# Altium PCB ESC.PcbDoc
Units mil, origin at the board's own origin, x right, y up, seen from the top; angles counter-clockwise.
Board outline 1760 x 2730 mil, 2 copper layers (Top Layer, Bottom Layer); 71 components, 57 nets, 293 pads, 166 vias.
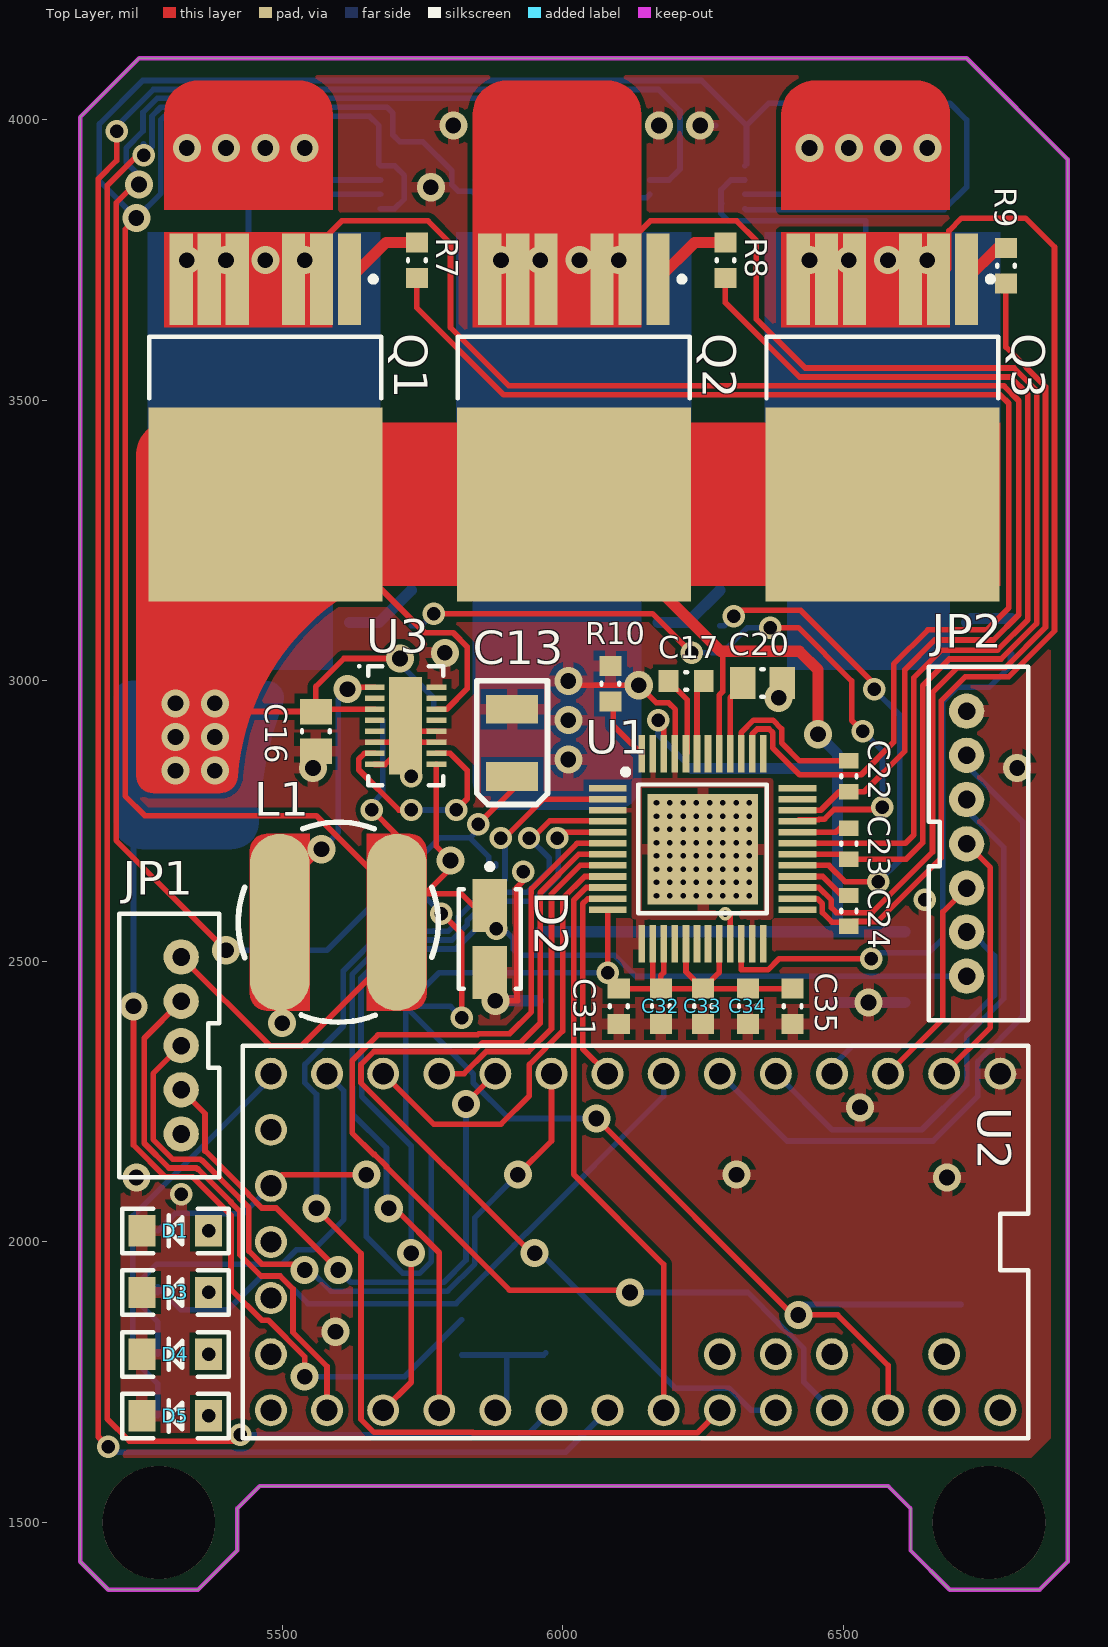
[diagram p0: Top Layer view]
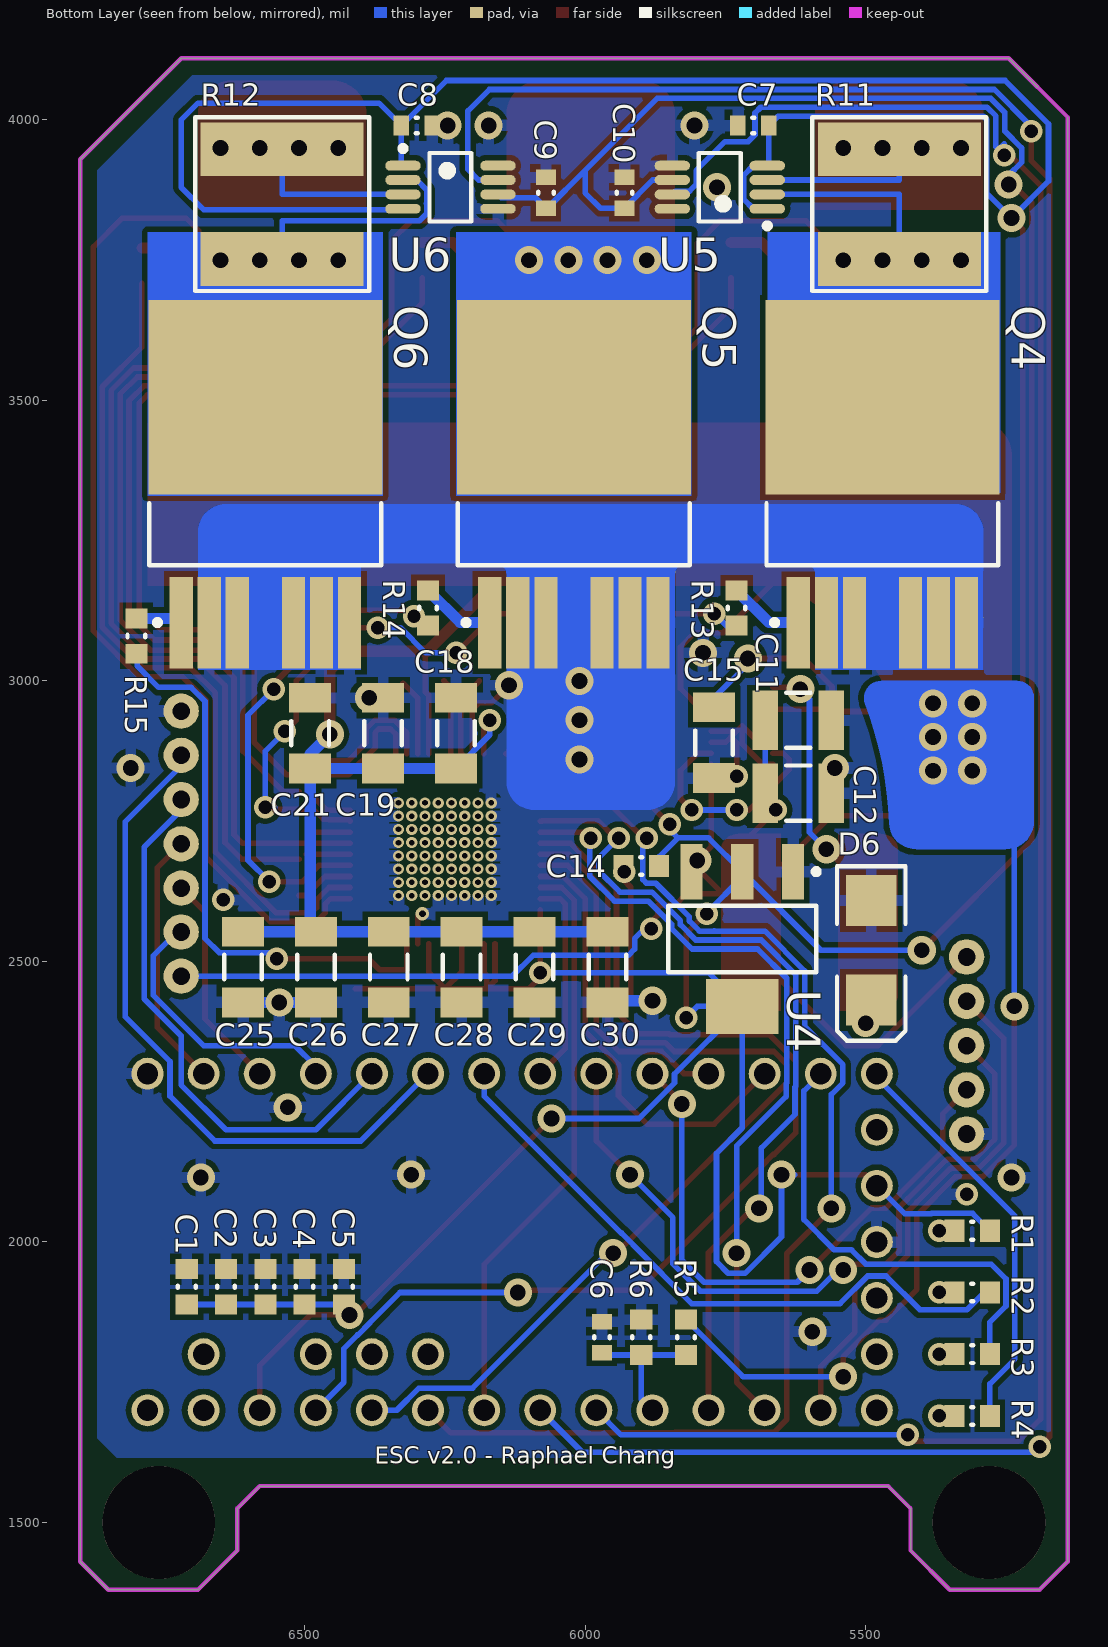
[diagram p1: Bottom Layer view, seen from below]

## Layer stack, top to bottom
Top Solder: solder mask 0.4, Solder Resist, Dk 3.5
Top Layer: signal copper 1.4
Dielectric 1: dielectric 12.6, FR-4, Dk 4.8
Bottom Layer: signal copper 1.4
Bottom Solder: solder mask 0.4, Solder Resist, Dk 3.5

## Board outline
5140,1430 5190,1380 5350,1380 5420,1450 5420,1525 5460,1565 6580,1565 6620,1525 6620,1450 6690,1380 6850,1380 6900,1430 6900,3930 6720,4110 5245,4110 5140,4005

## Design rules (kind name [scope] priority, off if disabled: settings)
Clearance Clearance_1 [InPolygon] p1: gap=9.84
Clearance [All] p2: gap=5.91
PolygonConnect [All] p1: connectstyle=Relief reliefconductorwidth=20 reliefentries=4 polygonreliefangle="90 Angle" airgapwidth=10
RoutingVias [All] p1: holewidth=28 width=50 viastyle="Through Hole" minholewidth=24 minwidth=40 maxholewidth=28 maxwidth=50
SolderMaskExpansion [All] p1: expansion=4
Width [All] p1: maxlimit=50 minlimit=10 preferedwidth=10
30 further rules are at their usual default settings.

## Classes and differential pairs
component class ESC: JP1 JP2
component class U_MCU: C1 C2 C3 C4 C5 C6 C7 C8 C9 C10 D1 D3 D4 D5 R1 R2 R3 R4 R5 R6 U2 U5 U6
component class U_Power: C11 C12 C13 C14 C15 C16 C17 C18 C19 C20 C21 C22 C23 C24 C25 C26 C27 C28 C29 C30 C31 C32 C33 C34 C35 D2 D6 L1 Q1 Q2 Q3 Q4 Q5 Q6 R7 R8 R9 R10 R11 R12 R13 R14 R15 U1 U3 U4

## Components (designator, comment, footprint, x,y, rotation, side; value= is the part's Value field where it differs from the comment)
C1 "2.2uF" CAPC0603(1608)55_N 6710,1920 r270 bottom
C2 "2.2uF" CAPC0603(1608)55_N 6640,1920 r270 bottom
C3 "2.2uF" CAPC0603(1608)55_N 6570,1920 r270 bottom
C4 "2.2uF" CAPC0603(1608)55_N 6500,1920 r270 bottom
C5 "2.2uF" CAPC0603(1608)55_N 6430,1920 r270 bottom
C6 "0.1uF" CAPC0603(1608)100_L 5970,1830 r90 bottom
C7 "10uF" CAPC0603(1608)100_L 5700,3990 r0 bottom
C8 "10uF" CAPC0603(1608)100_L 6300,3990 r180 bottom
C9 "0.1uF" CAPC0603(1608)100_L 6070,3870 r270 bottom
C10 "0.1uF" CAPC0603(1608)100_L 5930,3870 r270 bottom
C11 "100uF" CAPC1210(3225)280_N 5620,2930 r0 bottom
C12 "100uF" CAPC1210(3225)280_N 5620,2800 r0 bottom
C13 "100uF" AVX-CAPC7343_V 5910,2890 r90 top
C14 "2.2uF" CAPC0603(1608)55_N 5900,2670 r0 bottom
C15 "10uF" CAPC1206(3216)190_M 5770,2890 r90 bottom
C16 "4.7uF" CAPC0805(2012)145_N 5560,2910 r90 top
C17 "470nF" CAPC0603(1608)100_N 6220,3000 r0 top
C18 "10uF" CAPC1206(3216)190_M 6230,2907.01 r270 bottom
C19 "10uF" CAPC1206(3216)190_M 6360,2907.01 r270 bottom
C20 "10uF" CAPC0805(2012)145_N 6356.06,2996.16 r0 top
C21 "10uF" CAPC1206(3216)190_M 6490,2907.01 r270 bottom
C22 "470nF" CAPC0603(1608)100_L 6510,2830 r270 top
C23 "470nF" CAPC0603(1608)100_L 6510,2710 r270 top
C24 "470nF" CAPC0603(1608)100_L 6510,2590 r270 top
C25 "10uF" CAPC1206(3216)190_M 6610,2490 r90 bottom
C26 "10uF" CAPC1206(3216)190_M 6480,2490 r90 bottom
C27 "10uF" CAPC1206(3216)190_M 6350,2490 r90 bottom
C28 "10uF" CAPC1206(3216)190_M 6220,2490 r90 bottom
C29 "10uF" CAPC1206(3216)190_M 6090,2490 r90 bottom
C30 "10uF" CAPC1206(3216)190_M 5960,2490 r90 bottom
C31 "2.2uF" CAPC0603(1608)55_N 6100,2420 r90 top
C32 "2.2uF" CAPC0603(1608)55_N 6175,2420 r90 top
C33 "2.2uF" CAPC0603(1608)55_N 6250,2420 r90 top
C34 "2.2uF" CAPC0603(1608)55_N 6330,2420 r90 top
C35 "2.2uF" CAPC0603(1608)55_N 6410,2420 r90 top
D1 "LED-BLUE" LED-1206 5310,2020 r180 top
D2 "TVS 5V" VISH-DO-214AC-2_N 5870,2540 r270 top
D3 "LED-GREEN" LED-1206 5310,1910 r180 top
D4 "LED-RED" LED-1206 5310,1800 r180 top
D5 "LED-AMBER" LED-1206 5310,1690 r180 top
D6 "" SMB 5490,2520 r270 bottom
JP1 "Control Pins" JST-5-PTH-VERT 5320,2350 r90 top
JP2 "Encoder Pins" JST-7-PTH-VERT 6720,2710 r270 top
L1 "SDR0805-180ML" SDR0805-180ML 5600,2570 r0 top
Q1 "IRFS7530" DPAK127P1525X483-7N 5470,3470 r270 top
Q2 "IRFS7530" DPAK127P1525X483-7N 6020,3470 r270 top
Q3 "IRFS7530" DPAK127P1525X483-7N 6570,3470 r270 top
Q4 "IRFS7530" DPAK127P1525X483-7N 5470,3350 r90 bottom
Q5 "IRFS7530" DPAK127P1525X483-7N 6020,3350 r90 bottom
Q6 "IRFS7530" DPAK127P1525X483-7N 6570,3350 r90 bottom
R1 "10R" RESC0603(1608)_N 5310,2020 r180 bottom
R2 "15R" RESC0603(1608)_N 5310,1910 r180 bottom
R3 "180R" RESC0603(1608)_N 5310,1800 r180 bottom
R4 "150R" RESC0603(1608)_N 5310,1690 r180 bottom
R5 "200K" RESC0603(1608)_N 5820,1830 r90 bottom
R6 "10K" RESC0603(1608)_N 5900,1830 r90 bottom
R7 "4R7" RESC0603(1608)_N 5740,3750 r270 top
R8 "4R7" RESC0603(1608)_N 6290,3750 r270 top
R9 "4R7" RESC0603(1608)_N 6790,3740 r270 top
R10 "3K3" RESC0603(1608)_N 6085,2995 r270 top
R11 "" Shunt 5440,3850 r270 bottom
R12 "" Shunt 6540,3850 r270 bottom
R13 "4R7" RESC0603(1608)_N 5730,3130 r270 bottom
R14 "4R7" RESC0603(1608)_N 6280,3130 r270 bottom
R15 "4R7" RESC0603(1608)_N 6800,3080 r270 bottom
U1 "A4935" LQFP-48 6250,2700 r0 top
U2 "Teensy 3.0" TEENSY_3.0+4 6130,2000 r270 top
U3 "LTC3637" SON50P300X85_HS-17N 5720,2920 r0 top
U4 "TC2117" SOT-223-DB3_M 5720,2540 r270 bottom
U5 "LT1999" LT-MS8-8_N 5760,3880 r0 bottom
U6 "LT1999" LT-MS8-8_N 6240,3880 r180 bottom

## Footprints (in the part's own frame and the unit in brackets; to place one, negate y for a bottom-side part, rotate by r counter-clockwise, add the part's x,y. Pads: shape width x height; smd on the part's side, far side on the other; paste and mask are expansions set on the pad)
AVX-CAPC7343_V [mm] "SMT Capacitor, 2 Leads, Body 7.3x4.3mm"
  rect 1.3x2.35 smd: 1(-1.535,0.001) 2(1.515,0.001)
  silkscreen extent -2.8,-1.6 2.8,1.6, body extent -2.1,-1.1 2.1,1.1, height 1.9
CAPC0603(1608)55_N [mm] "Chip Capacitor, Body 1.6x0.8mm, Height 0.55mm, IPC Medium Density"
  rect 0.9x1 smd: 1(-0.8,0) 2(0.8,0)
  silkscreen extent -0.05,-0.4 0.05,0.4, body extent -0.87,-0.48 0.88,0.47, height 0.55
CAPC0603(1608)100_L [mm] "Chip Capacitor, Body 1.6x0.8mm, Height 1.0mm, IPC High Density"
  rect 0.7x0.9 smd: 1(-0.7,0) 2(0.7,0)
  silkscreen extent -0.05,-0.35 0.05,0.35, body extent -0.87,-0.47 0.88,0.48, height 1
CAPC0603(1608)100_N [mm] "Chip Capacitor, Body 1.6x0.8mm, Height 1.0mm, IPC Medium Density"
  rect 0.9x1 smd: 1(-0.8,0) 2(0.8,0)
  silkscreen extent -0.05,-0.4 0.05,0.4, body extent -0.87,-0.48 0.88,0.47, height 1
CAPC0805(2012)145_N [mm] "Chip Capacitor, Body 2.0x1.2mm, Height 1.45mm, IPC Medium Density"
  rect 1.15x1.45 smd: 1(-0.9,0) 2(0.9,0)
  silkscreen extent -0.05,-0.62 0.05,0.63, body extent -1.1,-0.72 1.1,0.73, height 1.45
CAPC1206(3216)190_M [mm] "Chip Capacitor, Body 3.2x1.6mm, Height 1.9mm, IPC Low Density"
  rect 1.35x1.9 smd: 1(-1.6,0) 2(1.6,0)
  silkscreen extent -0.55,-0.85 0.55,0.85, body extent -1.7,-0.9 1.7,0.9, height 1.9
CAPC1210(3225)280_N [mm] "Chip Capacitor, Body 3.2x2.5mm, Height 2.8mm, IPC Medium Density"
  rect 1.15x2.7 smd: 1(-1.5,0) 2(1.5,0)
  silkscreen extent -0.55,-1.25 0.55,1.25, body extent -1.7,-1.4 1.7,1.4, height 2.8
DPAK127P1525X483-7N [mm] "D2-PAK, 7-Pads, Body 7.93x8.63mm (max), IPC Medium Density"
  rect 4.15x1.05 smd mask+0.051: 1(-6.25,3.81) 2(-6.25,2.54) 2(-6.25,-1.27) 2(-6.25,1.27) 2(-6.25,-3.81) 2(-6.25,-2.54)
  rect 8.8x10.6 smd: 8(3.95,0)
  silkscreen extent -6.37,-5.25 -0.85,5.25, body extent -7,-5 8,5, height 4.2
JST-5-PTH-VERT [mil]
  round 63 hole 31.5: 1(-157.48,0) 2(-78.74,0) 3(0,0) 4(79,0) 5(158,0)
  silkscreen extent -234,-68 235,110, body extent -236,-69 232,108, height 236
JST-7-PTH-VERT [mil]
  round 63 hole 31.5: 1(-236.22,0) 2(-157.48,0) 3(-78.74,0) 4(0.26,0) 5(79.26,0) 6(157.48,0) 7(236.22,0)
  silkscreen extent -315,-68 315,110, body extent -317,-67 309,110, height 236
LED-1206 [mil]
  rect 48x56 smd: A(-59.06,0) C(60,0)
  silkscreen extent -94,-39 95,40, body extent -63,-31 63,31, height 43
LQFP-48 [mm]
  rect 1.7x0.3 smd mask+0.076: 1(-4.318,2.767) 2(-4.318,2.267) 3(-4.318,1.767) 4(-4.318,1.267) 5(-4.318,0.767) 6(-4.318,0.267) 7(-4.318,-0.233) 8(-4.318,-0.733) 9(-4.318,-1.233) 10(-4.318,-1.733) 11(-4.318,-2.233) 12(-4.318,-2.733) 25(4.282,-2.733) 26(4.282,-2.233) 27(4.282,-1.733) 28(4.282,-1.233) 29(4.282,-0.733) 30(4.282,-0.233) 31(4.282,0.267) 32(4.282,0.767) 33(4.282,1.267) 34(4.282,1.767) 35(4.282,2.267) 36(4.282,2.767)
  rect 0.3x1.7 smd mask+0.076: 13(-2.768,-4.283) 14(-2.268,-4.283) 15(-1.768,-4.283) 16(-1.268,-4.283) 17(-0.768,-4.283) 18(-0.268,-4.283) 19(0.232,-4.283) 20(0.732,-4.283) 21(1.232,-4.283) 22(1.732,-4.283) 23(2.232,-4.283) 24(2.732,-4.283) 37(2.732,4.317) 38(2.232,4.317) 39(1.732,4.317) 40(1.232,4.317) 41(0.732,4.317) 42(0.232,4.317) 43(-0.268,4.317) 44(-0.768,4.317) 45(-1.268,4.317) 46(-1.768,4.317) 47(-2.268,4.317) 48(-2.768,4.317)
  rect 5x5 smd: 49(0,0)
  silkscreen extent -3.63,-2.9 2.9,3.63, body extent -4.5,-4.5 4.5,4.5, height 1.5
LT-MS8-8_N [mm] "SOP, 8-Leads, Body 3x3mm, Pitch 0.65mm, IPC Medium Density"
  oval 1.6x0.45 smd: 1(-2.15,0.975) 2(-2.15,0.325) 3(-2.15,-0.325) 4(-2.15,-0.975) 5(2.15,-0.975) 6(2.15,-0.325) 7(2.15,0.325) 8(2.15,0.975)
  silkscreen extent -2.27,-1.55 0.95,1.87, body extent -1.55,-1.55 1.55,1.55, height 1.1
RESC0603(1608)_N [mm] "Chip Resistor, Body 1.6x0.8mm, IPC Medium Density"
  rect 0.9x1 smd: 1(-0.8,0) 2(0.8,0)
  silkscreen extent -0.05,-0.4 0.05,0.4, body extent -0.85,-0.47 0.85,0.47, height 0.6
SDR0805-180ML [mm]
  rrect100% 2.7x8 smd: 1(-2.65,0) 2(2.65,0)
  Top Layer region: -3.25,4 -1.3,4 -1.3,-4 -3.25,-4 -3.537,-3.943 -3.78,-3.78 -3.943,-3.537 -4,-3.25 -4,-3.25 -4,3.25 -3.943,3.537 -3.78,3.78 -3.537,3.943 -3.25,4
  Top Layer region: 3.25,4 1.3,4 1.3,-4 3.25,-4 3.537,-3.943 3.78,-3.78 3.943,-3.537 4,-3.25 4,-3.25 4,3.25 3.943,3.537 3.78,3.78 3.537,3.943 3.25,4
  silkscreen extent -4.52,-4.53 4.52,4.52, body extent -3.9,-3.9 3.9,3.9, height 5.3
Shunt [mm]
  rect 2.44x7.38 smd: 1(-2.48,0) 2(2.48,0)
  silkscreen extent -3.94,-3.94 3.94,3.94
SMB [mm] "DO-214-AA/SMB; 2 C-Bend Leads; Body 5.3 x 3.6 mm, inc. leads (LxW)"
  rect 2.3x2.3 smd: 1(-2.25,0) 2(2.25,0)
  silkscreen extent -3.8,-1.55 4.1,1.55
SON50P300X85_HS-17N [mm] "SON, 16-Leads, Body 5.00x3.00mm, Pitch 0.50mm, Thermal Pad 4.40x1.49mm, IPC Medium Density"
  rect 0.9x0.25 smd mask+0.076: 1(-1.395,1.75) 2(-1.395,1.25) 3(-1.395,0.75) 4(-1.395,0.25) 5(-1.395,-0.25) 6(-1.395,-0.75) 7(-1.395,-1.25) 8(-1.395,-1.75) 9(1.395,-1.75) 10(1.395,-1.25) 11(1.395,-0.75) 12(1.395,-0.25) 13(1.395,0.25) 14(1.395,0.75) 15(1.395,1.25) 16(1.395,1.75)
  rect 1.49x4.4 smd mask+0.076: 17(0,0)
  silkscreen extent -2.15,-2.7 1.7,2.75, body extent -1.56,-2.05 1.56,2.05, height 0.8
SOT-223-DB3_M [mm] "SOT223, 4-Leads, Body 6.5x3.5mm, Pitch 2.3mm, Lead Span 7mm, IPC Low Density"
  rect 2.5x1 smd: 1(-3.05,2.3) 2(-3.05,0) 3(-3.05,-2.3)
  rect 2.5x3.3 smd: 2(3.05,0)
  silkscreen extent -3.17,-3.35 1.5,3.47, body extent -1.85,-3.35 1.85,3.35, height 1.8
TEENSY_3.0+4 [mil]
  round 57 hole 38: 0(-300,550) 1(-300,450) 2(-300,350) 3(-300,250) 3.3V(300,450) 3.3V1(-100,-650) 4(-300,150) 5(-300,50) 6(-300,-50) 7(-300,-150) 8(-300,-250) 9(-300,-350) 10(-300,-450) 11(-300,-550) 12(-300,-650) 13(300,-650) 14/A0(300,-550) 15/A1(300,-450) 16/A2(300,-350) 17/A3(300,-250) 18/A4(300,-150) 19/A5(300,-50) 20/A6(300,50) 21/A7(300,150) 22/A8(300,250) 23/A9(300,350) A10(200,250) A11(200,150) AGND(300,550) AREF(200,350) GND(-300,650) GND1(0,-650) PGM(100,-650) RESET(200,-650) VBAT(-200,-650) VIN(300,650) VUSB(200,550)
  silkscreen extent -350,-700 350,700, body extent -348,-708 349,720, height 505
VISH-DO-214AC-2_N [mm] "DO-214AC, 2-Leads, Body 4.5x2.79mm, IPC Medium Density"
  rect 2.4x1.55 smd: 1(-1.525,0) 2(1.525,0)
  silkscreen extent -3.4,-1.4 2.25,1.4, body extent -2.25,-1.4 2.25,1.39, height 2.29

## Part data
C1 C2 C3 C4 C5 C14 C31 C32 C33 C34 C35: library part CMP-1035-02762-1, "CAP 2.2uF 16V ±10% 0603 (1608 Metric) Thickness 0.55mm SMD"
C6: library part CMP-1035-02591-1, "CAP 100nF 50V ±5% 0603 (1608 Metric) Thickness 1mm SMD"
C7: library part CMP-1035-02796-1, "CAP 10uF 6.3V ±10% 0603 (1608 Metric) Thickness 1mm SMD"
C8: library part CMP-1035-02797-1, "CAP 10uF 6.3V ±20% 0603 (1608 Metric) Thickness 1mm SMD"
C9 C10: library part CMP-1035-02577-1, "CAP 100nF 6.3V ±20% 0603 (1608 Metric) Thickness 1mm SMD"
C11 C12: library part CMP-1038-02301-1, "CAP 100uF 10V ±10% 1210 (3225 Metric) Thickness 2.8mm SMD"
C13: library part AVX-CAP-P-2
C15 C18 C19 C21 C25 C26 C27 C28 C29 C30: library part CMP-1037-04982-1, "CAP 10uF 50V ±10% 1206 (3216 Metric) Thickness 1.9mm SMD"
C16: library part CMP-1036-04900-1, "CAP 4.7uF 50V ±10% 0805 (2012 Metric) Thickness 1.45mm SMD"
C17: library part CMP-1035-02704-1, "CAP 470nF 25V ±20% 0603 (1608 Metric) Thickness 1mm SMD"
C20: library part CMP-1036-04932-1, "CAP 10uF 25V ±10% 0805 (2012 Metric) Thickness 1.45mm SMD"
C22 C23 C24: library part CMP-1035-02703-1, "CAP 470nF 25V ±10% 0603 (1608 Metric) Thickness 1mm SMD"
D1: library part LED-BLUE1206
D2: library part CMP-0548-00235-1, "Transient Voltage Suppressor, 6.40 to 231 V, 5 V Stand-off Voltage, Uni-Directional, -55 to 155 degC, 2-pin DO-214AC, Pb-Free, Tape and Reel"
D3: library part LED-GREEN1206
D4: library part LED-RED1206
D5: library part LED-AMBER1206
D6: library part "D Schottky", "Schottky Diode"
JP1: library part JST_5_VERT
JP2: library part JST_7_VERT
L1: "Inductor"
Q1 Q2 Q3 Q4 Q5 Q6: "N-Channel MOSFET"
R1: library part CMP-1012-00026-1, "10R 0.1W 5% 0603 (1608 Metric)  SMD"
R2: library part CMP-1012-00030-1, "15R 0.1W 5% 0603 (1608 Metric)  SMD"
R3: library part CMP-1012-00056-1, "180R 0.1W 5% 0603 (1608 Metric)  SMD"
R4: library part CMP-1012-00054-1, "150R 0.1W 5% 0603 (1608 Metric)  SMD"
R5: library part CMP-1012-00129-1, "200K 0.1W 5% 0603 (1608 Metric)  SMD"
R6: library part CMP-1012-00098-1, "10K 0.1W 5% 0603 (1608 Metric)  SMD"
R7 R8 R9 R13 R14 R15: library part CMP-1012-00018-1, "4R7 0.1W 5% 0603 (1608 Metric)  SMD"
R10: library part CMP-1012-00086-1, "3K3 0.1W 5% 0603 (1608 Metric)  SMD"
R11: library part Shunt, "0.001R"
R12: library part Shunt, "Resistor"
U2: library part TEENSY_3.0+4
U4: library part PM-LINEREG-TC2117-IL4
U5 U6: library part CMP-0359-00619-2, "Single Channel, High Voltage, Bidirectional Current Sense Amplifier, 2 MHz Typical GBW, 3 V/us Typical SR, 4.5 to 5.5 V, 8-Pin SOP (MS8-8), High Temperature / Automotive, Pb-Free, Reel"

## Free pads (board coordinates)
  round 201 hole 201: 0(5280,1500) 1(6760,1500)

## Via types
v1: diameter 50, hole 28, Top Layer to Bottom Layer, 68 vias
v2: diameter 20, hole 10, Top Layer to Bottom Layer, 64 vias
v3: diameter 40, hole 24, Top Layer to Bottom Layer, 33 vias
v4: diameter 24, hole 12, Top Layer to Bottom Layer, 1 vias

## Nets (pads, with @x,y where several pads share a name; then routed paths per layer and width w, separated by ;. In a path a pad name is that pad's centre, name@x,y a point inside that pad or via, vN(x,y) a via of type N, cw(c..) or ccw(c..) an arc to the next point about the centre after c; other vN are vias at no path point)
5V: C7.1 C8.1 C11.2 C12.2 D2.1 JP1.5 JP2.7 L1.2 U3.9 U4.3 U5.1 U5.4 U6.1 U6.4 | length 7248.1
  Top Layer w10: v1(5240,3825) 5220,3805 5220,2795 5255,2760 5560.78,2760 5704.33,2616.45 L1.2 ; JP1.5 5478,2350 5535,2350 5704.33,2519.33 L1.2 ; v3(5660,2770) 5704.33,2725.67 L1.2 ; U3.9 5774.92,2705.08 v1(5800,2680) 5800,2665.67 L1.2@5754.33,2620 ; D2.1@5869.13,2610.91 D2.1@5870,2610.04 ; v3(5881.74,2558.26) 5881.74,2570.85 5870,2582.59 D2.1 5839.96,2600.04 5819.09,2620.91 5755.24,2620.91 L1.2@5754.33,2620 ; L1.2 L1.2@5754.33,2620
  Bottom Layer w10: v1(5240,3825) 5283.82,3868.82 5283.82,4000.19 5290.21,4006.57 5655.87,4006.57 C7.1 5672.44,3921.3 U5.4 5700.35,3918.39 5717.76,3900.98 5717.76,3859.02 5700.35,3841.61 U5.1 ; v1@5240,3830 5235,3830 5174.09,3890.91 5174.09,3992.8 5251.49,4070.2 6247.36,4070.2 C8.1 ; v3(5660,2770) 5660,2780.94 C12.2 C11.2 ; v3(5881.74,2558.26) 5881.74,2569.15 5882.59,2570 5911.69,2540.9 5911.69,2521.9 5922.69,2510.91 6092.8,2510.91 6129.93,2473.78 JP2.7 ; U6.4 6326.26,3840 6680,3840 6720,3880 6720,4000 6690,4030 6367.56,4030 C8.1 ; U6.1 6327.56,3921.3 C8.1
C1: U2.18/A4 U5.7 | length 3897.5
  Top Layer w10: v3(5252.91,3937.09) 5251.73,3935.91 5240.91,3935.91 5188.19,3883.19 5188.19,1684.39 5227.58,1645 5413.98,1645 v3(5425.05,1656.07)
  Bottom Layer w10: v3(5252.91,3937.09) 5252.91,3957.09 5262.91,3947.09 5267.91,3952.09 5267.91,4006.77 5283.62,4022.48 5686.88,4022.48 5697.13,4012.23 5697.13,3973.51 5709.26,3961.38 5750.47,3961.38 5802.24,3909.61 5802.24,3884.61 5813.82,3873.03 5838.82,3873.03 U5.7 ; v3(5425.05,1656.07) 5936.07,1656.07 U2.18/A4
C2: U2.19/A5 U6.7 | length 4526.2
  Top Layer w10: v3@5182.76,1635 v3(5190,1635) 5172.28,1652.72 5172.28,3894.78 5205,3927.49 v3(5205,3980)
  Bottom Layer w10: v3(5190,1635) 5199.84,1625.16 6005.16,1625.16 U2.19/A5 ; v3(5205,3980) 5208.27,3976.73 5208.27,3992.12 5270.44,4054.29 6170.71,4054.29 6209.09,4015.91 6209.09,3912.11 6189.78,3892.8 U6.7
CA: C22.1 U1.39 | length 283.8
  Top Layer w10: U1.39 6318.19,2908.19 6340.24,2930.24 6374.57,2930.24 6390.28,2914.53 6390.28,2889.72 6422.44,2857.56 C22.1
CB: C23.1 U1.32 | length 78.6
  Top Layer w10: U1.32 6486.73,2730.2 C23.1@6494.09,2737.56
CC: C24.1 U1.28 | length 105.4
  Top Layer w10: U1.28 6463.54,2651.46 6497.47,2617.53 C24.1@6509.97,2617.53
CLK: JP2.5 U2.1 | length 388.7
  Top Layer w10: U2.1 6677.59,2397.59 6677.59,2588.33 JP2.5
CS: JP2.6 U2.2 | length 492.9
  Bottom Layer w10: U2.2 6480,2312.52 6517.48,2350 6680,2350 6770,2440 6770,2510 6727.48,2552.52 JP2.6
DIO: JP2.4 U2.0 | length 461.4
  Top Layer w10: U2.0 6762.41,2382.41 6762.41,2667.33 JP2.4
GHA: R7.2 U1.38 | length 2294.6
  Top Layer w10: R7.2 5740,3665 5895,3510 6780,3510 6795,3495 6795,3130 6755.91,3090.91 6650.91,3090.91 6590,3030 6590,2890.64 6532.23,2832.87 6422.2,2832.87 6374.37,2880.71 6374.37,2907.94 6367.98,2914.33 6346.82,2914.33 6337.87,2905.38 U1.38
GHB: R8.2 U1.31 | length 1792.4
  Top Layer w10: R8.2 6290,3674.03 6422.22,3541.81 6798.19,3541.81 6828.88,3511.12 6828.88,3108.88 6775,3055 6675,3055 6625.91,3005.91 6625.91,2725.91 6610.51,2710.51 U1.31
GHC: R9.2 U1.27 | length 1487.7
  Top Layer w10: U1.27 6456.5,2631.77 6478.86,2609.41 6478.86,2596.03 6487.77,2587.13 6551.34,2587.13 6659.09,2694.88 6659.09,2979.09 6703.19,3023.19 6788.18,3023.19 6860.69,3095.71 6860.69,3524.31 6790,3595 R9.2
GLA: R13.2 U1.33 | length 1313.5
  Top Layer w10: v3(5770,3120) 6160,3120 v3(6230,3050) ; v3(6370,3095) 6420,3095 6515,3000 6515,2930 v3(6535,2910) ; U1.33 6421.46,2752.76 6456.56,2752.76 6457.47,2753.66 6466.67,2753.66 6483.91,2770.91 6565.91,2770.91 v3(6570,2775)
  Bottom Layer w10: R13.2 5748.5,3098.5 v3(5770,3120) ; v3(6230,3050) 6284.32,3050 6329.32,3095 v3(6370,3095) ; v3(6535,2910) 6570,2875 6570,2791.29 6553.71,2775 v3(6570,2775)
GLB: R14.2 U1.29 | length 884.7
  Top Layer w10: v3(6305,3115) 6315.91,3125.91 6424.09,3125.91 6555,2995 v3(6555,2985) ; U1.29 6475,2671.14 6475,2670.52 6503.28,2642.24 v3(6562.76,2642.24)
  Bottom Layer w10: R14.2 6288.5,3098.5 v3(6305,3115) ; v3(6555,2985) 6600.91,2939.09 6600.91,2680.39 v3(6562.76,2642.24)
GLC: R15.2 U1.22 | length 1025.9
  Top Layer w10: U1.22 6318.19,2485 6365.97,2485 6385.97,2505 v3(6550,2505) v3@6550,2499.99
  Bottom Layer w10: v3(6550,2505) 6560.51,2515.51 6651.92,2515.51 6677.59,2541.19 6677.59,2963.79 6702.44,2988.63 6760.12,2988.63 6798.25,3026.75 6798.25,3046.75 R15.2
GND: C1.1 C2.1 C3.1 C4.1 C5.1 C6.2 C7.2 C8.2 C9.1 C10.1 C11.1 C12.1 C13.2 C14.2 C15.1 C16.1 C18.1 C19.1 C20.2 C21.1 C25.1 C26.1 C27.1 C28.1 C29.1 C30.1 C31.1 C32.1 C33.1 C34.1 C35.1 D1.C D2.2 D3.C D4.C D5.C D6.1 JP1.1 JP2.1 Q4.2 Q5.2 Q6.2 R6.2 R10.1 U1.3 U1.13 U1.21 U1.23 U1.45 U1.47 U1.49 U2.GND U2.GND1 U3.6 U3.8 U3.11 U3.12 U3.16 U3.17 U4.1 U5.5 U6.5 | length 1252.1
  Top Layer w10: U3.8 5683.45,2851.1 5720,2887.65 U3.17 ; U3.6 5690.47,2890.47 U3.17 ; v3(5730,2830) 5730,2890 U3.17@5740,2900 ; U3.11 5749.53,2890.47 U3.17@5740,2900 ; U3.12 U3.17@5729.84,2910.16 ; v1(5880,2430) 5920,2430 5918.59,2431.41 5918.59,2632.26 5930,2643.67 v3(5930,2660) ; v1(6010,3000) 6017.72,2992.28 v1(6135.59,2992.28) 6166.96,2960.91 6189.09,2960.91 6200.91,2949.09 6200.91,2870.79 U1.45 ; v4(6290,2585) 6295,2585 6298.5,2581.5 U1.21 ; U3.17 U3.17@5729.84,2910.16 ; U3.17@5729.84,2910.16 U3.17@5740,2900
  Bottom Layer w10: v3(5930,2660) 5930,2650 5931.5,2651.5 C14.2 ; C30.1@5957.01,2430 C30.1 ; v1(6245,3990) C8.2
  Bottom Layer w20: v1(5880,2430) C30.1@5957.01,2430 ; C26.1 C25.1
  other v1: 5595,1840 5240,2115 6685,2115 6310,2120 6530,2240 6545,2427.01 5555,2845 6810,2845 6010,2860 6010,2930 6385,2970 5790,3050 5765,3880 5805,3990 6171.85,3990
  other v2: 6167.32,2617.32 6190.94,2617.32 6214.57,2617.32 6238.19,2617.32 6261.81,2617.32 6285.43,2617.32 6309.06,2617.32 6332.68,2617.32 6167.32,2640.94 6190.94,2640.94 6214.57,2640.94 6238.19,2640.94 6261.81,2640.94 6285.43,2640.94 6309.06,2640.94 6332.68,2640.94 6167.32,2664.57 6190.94,2664.57 6214.57,2664.57 6238.19,2664.57 6261.81,2664.57 6285.43,2664.57 6309.06,2664.57 6332.68,2664.57 6167.32,2688.19 6190.94,2688.19 6214.57,2688.19 6238.19,2688.19 6261.81,2688.19 6285.43,2688.19 6309.06,2688.19 6332.68,2688.19 6167.32,2711.81 6190.94,2711.81 6214.57,2711.81 6238.19,2711.81 6261.81,2711.81 6285.43,2711.81 6309.06,2711.81 6332.68,2711.81 6167.32,2735.43 6190.94,2735.43 6214.57,2735.43 6238.19,2735.43 6261.81,2735.43 6285.43,2735.43 6309.06,2735.43 6332.68,2735.43 6167.32,2759.06 6190.94,2759.06 6214.57,2759.06 6238.19,2759.06 6261.81,2759.06 6285.43,2759.06 6309.06,2759.06 6332.68,2759.06 6167.32,2782.68 6190.94,2782.68 6214.57,2782.68 6238.19,2782.68 6261.81,2782.68 6285.43,2782.68 6309.06,2782.68 6332.68,2782.68
  other v3: 5320,2085 6645,2610
NetC6_1: C6.1 R5.1 R6.1 U2.17/A3 | length 258.4
  Bottom Layer w10: R5.1 R6.1 ; U2.17/A3 5900,1720 R6.1 ; C6.1 5966.06,1798.5 R6.1
NetC17_1: C17.1 U1.44 | length 144.6
  Top Layer w10: C17.1 6221.69,2966.81 6221.69,2871.89 U1.44
NetC17_2: C17.2 U1.43 | length 135
  Top Layer w10: U1.43 6239.45,2987.95 C17.2
NetC20_1: C20.1 U1.40 | length 137
  Top Layer w10: U1.40 6298.5,2970.09 C20.1@6324.57,2996.16
NetD1_A: D1.A R1.1
  other v3: 5369.06,2020
NetD3_A: D3.A R2.1
  other v3: 5369.06,1910
NetD4_A: D4.A R3.1
  other v3: 5369.06,1800
NetD5_A: D5.A R4.1
  other v3: 5369.06,1690
NetD6_2: D6.2 L1.1 U3.1 | length 697.3
  Top Layer w10: v1(5500,2390) 5500,2565.67 L1.1 5495.67,2625.67 v1(5570,2700) ; v1(5616.46,2985.43) 5618.03,2985.43 5621.49,2988.9 U3.1
  Bottom Layer w10: v1(5570,2700) 5600,2730 5600,2967.41 5616.46,2983.86 v1(5616.46,2985.43)
NetQ1_2: Q1.1 R7.1 | length 147.1
  Top Layer w20: Q1.1 5685.43,3781.5 R7.1
NetQ2_2: Q2.1 R8.1 | length 147.1
  Top Layer w20: Q2.1 6235.43,3781.5 R8.1
NetQ3_2: Q3.1 R9.1 | length 93
  Top Layer w20: Q3.1 6775.43,3771.5 R9.1
NetQ4_2: Q4.1 R13.1 | length 133.8
  Bottom Layer w20: Q4.1 5672.44,3103.94 R13.1
NetQ5_2: Q5.1 R14.1 | length 133.8
  Bottom Layer w20: Q5.1 6222.44,3103.94 R14.1
NetQ6_2: Q6.1 R15.1 | length 83.1
  Bottom Layer w20: Q6.1 6727.56,3111.5 R15.1
NetR2_2: R2.2 U2.5 | length 1167.8
  Bottom Layer w10: R2.2 5278.5,1920.17 5319.58,1879.09 5403.37,1879.09 5463.68,1939.41 5496.32,1939.41 5545.73,1890 5795.68,1890 5795.8,1890.12 5810.12,1890.12 5914.09,1994.09 5914.09,1994.87 5935.13,2015.91 5935.91,2015.91 6180,2260 U2.5
NetR3_2: R3.2 U2.11 | length 822.4
  Bottom Layer w10: R3.2 5278.5,1857.18 5249.88,1885.8 5249.88,1934.2 5276.27,1960.59 5499.82,1960.59 5525.13,1985.91 5555.91,1985.91 5610,2040 5610,2269.28 5580,2299.28 U2.11
NetR4_2: R4.2 U2.12 | length 730.4
  Bottom Layer w10: R4.2 5278.5,1747.18 5233.98,1791.7 5233.98,2046.53 5480,2292.55 U2.12
NetR10_2: R10.2 U1.48 | length 111.2
  Top Layer w10: R10.2@6090,2960 6090,2920.98 U1.48
NetR11_1: R11.1 U5.3 | length 290.2
  Bottom Layer w10: R11.1 5440,3892.8 U5.3
  other v1: 5330,3950 5400,3950 5470,3950 5540,3950
NetR12_1: R12.1 U6.3 | length 295.8
  Bottom Layer w10: U6.3 6540,3867.2 R12.1
  other v1: 6440,3950 6510,3950 6580,3950 6650,3950
NetU1_2: U1.2 U2.21/A7 | length 2204.2
  Top Layer w10: v1(5561.19,2060) 5561.19,2058.81 5640.59,1979.41 5640.59,1683.68 5663.68,1660.59 5839.41,1660.59 5840,1660 6240,1660 U2.21/A7 ; v3(5890,2720) 5896.29,2720 5965.55,2789.25 U1.2
  Bottom Layer w10: v1(5561.19,2060) 5561.19,2263.08 5540.59,2283.68 5540.59,2316.32 5608.78,2384.51 5608.78,2483.29 5679.55,2554.06 5769.07,2554.06 5769.83,2554.81 5770.58,2554.06 5796.19,2554.06 5814.29,2572.16 5814.29,2579.5 5874.2,2639.41 5890.74,2639.41 5897.13,2645.8 5897.13,2712.87 v3(5890,2720) v3@5890,2707.23
NetU1_4: U1.4 U2.16/A2 | length 1534
  Top Layer w10: v1(5690,2060) 5690,2043.04 5703.87,2056.91 5780,1980.78 U2.16/A2 ; v3(5940,2720) 5946.29,2720 5977.2,2750.91 6077.13,2750.91 6076.1,2749.88 U1.4
  Bottom Layer w10: v1(5690,2060) 5685.91,2064.09 5685.91,2167.48 5625.91,2227.48 5625.91,2275.87 5624.69,2277.09 5624.69,2476.7 5686.14,2538.15 5802.78,2538.15 5830.2,2565.57 5830.2,2572.91 5880.79,2623.5 5937.82,2623.5 5976.02,2661.7 5976.02,2684.2 5940.23,2720 v3(5940,2720) v3@5935.68,2720
NetU1_5: U1.5 U2.15/A1 | length 1421.9
  Top Layer w10: U2.15/A1 5730,1750 v1(5730,1980) ; v3(5990,2720) 6000.2,2730.2 U1.5
  Bottom Layer w10: v1(5730,1980) 5730,2171.19 5641.81,2259.38 5641.81,2282.46 5640.59,2283.68 5640.59,2470.11 5692.73,2522.24 5809.36,2522.24 5846.1,2558.98 5846.1,2566.32 5887.38,2607.6 5947.6,2607.6 5991.93,2651.93 5991.93,2718.07 v3(5990,2720)
NetU1_6: U1.6 U2.23/A9 | length 1969.2
  Top Layer w10: U1.6 6025.52,2710.51 5944.09,2629.08 5944.09,2410 5905.31,2371.22 5850.5,2371.22 5848.38,2369.09 5670.87,2369.09 5624.69,2322.91 5624.69,2194.53 5663.32,2155.91 5664.87,2155.91 5685.91,2134.87 5685.91,2133.32 5905.13,1914.09 6115.91,1914.09 v1(6120,1910)
  Bottom Layer w10: v1(6120,1910) 6330,1910 6384.09,1855.91 6384.09,1855.13 6405.13,1834.09 6405.91,1834.09 6430,1810 6430,1750 U2.23/A9
NetU1_7: U1.7 U2.22/A8 | length 1784.9
  Top Layer w10: v1(5950,1980) 5944.27,1980 5640.59,2283.68 5640.59,2316.32 5663.68,2339.41 5841.18,2339.41 5857.09,2355.31 5925.31,2355.31 5960,2390 5960,2622.49 6028.33,2690.83 U1.7
  Bottom Layer w10: v1(5950,1980) 5950,1968.19 5938.19,1980 5960,1980 6200.59,1739.41 6296.32,1739.41 6335.73,1700 U2.22/A8
NetU1_8: U1.8 U2.9 | length 594.3
  Top Layer w10: U2.9 5824.27,2300 5863.68,2339.41 5939.41,2339.41 5980,2380 5980,2620 6031.14,2671.14 U1.8
NetU1_9: U1.9 U2.10 | length 791.3
  Top Layer w10: U2.10 5770,2210 5890,2210 5940.59,2260.59 5940.59,2316.32 6000,2375.73 6000,2612.18 6039.27,2651.46 U1.9
NetU1_10: U1.10 U2.20/A6 | length 1045.3
  Top Layer w10: U1.10 6042.08,2631.77 6019.72,2609.41 6019.72,2120.28 6180,1960 U2.20/A6
NetU1_11: U1.11 U2.6 | length 369.4
  Top Layer w10: U2.6 6035.63,2344.37 6035.63,2602.82 6044.89,2612.09 U1.11
NetU3_7: U3.7 U3.10 | length 401.4
  Top Layer w10: U3.7 5646.7,2870.79 5636.46,2860.54 5636.46,2841.66 5708.12,2770 v3(5730,2770) ; U3.10 5799.69,2870.79 5830,2840.47 5830,2790 v3(5810,2770)
  Bottom Layer w10: v3(5730,2770) v3(5810,2770)
PWM_IN: JP1.4 U2.14/A0 | length 941
  Top Layer w10: JP1.4 5254.09,2363.09 5254.09,2175.96 5298.24,2131.81 5347.16,2131.81 5348.97,2130 5350,2130 5408.78,2071.22 5408.78,2070.5 5424.69,2054.6 5424.69,1977.09 5463.03,1938.75 5463.68,1939.41 5496.32,1939.41 5519.41,1916.32 5519.41,1838.82 5580,1778.22 U2.14/A0
QUAD_A: JP2.3 U2.3 | length 1009.1
  Bottom Layer w10: U2.3 6480,2200 6640,2200 6720,2280 6720,2367.51 6785.91,2433.41 6785.91,2703.81 6699.71,2790 6720,2790 JP2.3
QUAD_B: JP2.2 U2.4 | length 1247.9
  Bottom Layer w10: U2.4 6400,2180 6660,2180 6740,2260 6740,2321.6 6820,2401.6 6820,2748.71 6703.71,2865 6720,2865 JP2.2
SA: C22.2 Q1.2 Q4.8 R11.2 U1.34 U5.2 | length 2905.4
  Top Layer w10: Q1.2@5520,3716.06 5520,3733.85 5606.15,3820 5760,3820 5800,3780 5800,3630 5904.09,3525.91 6786.59,3525.91 6812.98,3499.52 6812.98,3117.98 6767.93,3072.93 6662.93,3072.93 6610,3020 6610,2875 6537.44,2802.44 C22.2 ; U1.34 6460.08,2769.57 C22.2@6492.95,2802.44
  Bottom Layer w10: R11.2 5440,3867.2 U5.2
  other v1: 5330,3750 5400,3750 5470,3750 5540,3750
SB: C23.2 Q2.2 Q5.8 U1.30 | length 2201.7
  Top Layer w10: Q2.2@6070,3716.06 6095,3741.06 6095,3758.85 6156.15,3820 6310,3820 6345,3785 6345,3645 6432.28,3557.72 6804.78,3557.72 6844.79,3517.71 6844.79,3102.29 6781.59,3039.09 6689.09,3039.09 6641.81,2991.81 6641.81,2711.81 6612.44,2682.44 C23.2 ; U1.30 C23.2@6496.68,2690.83
  other v1: 5890,3750 5960,3750 6030,3750 6100,3750
SC: C24.2 Q3.2 Q6.8 R12.2 U1.26 U6.2 | length 2290.6
  Top Layer w10: U1.26 6453.69,2612.09 6462.95,2602.82 6462.95,2587.05 6480,2570 6502.44,2570 C24.2 6518.78,2571.22 6561.22,2571.22 6675,2685 6675,2965 6717.28,3007.28 6794.76,3007.28 6876.6,3089.12 6876.6,3773.4 6825,3825 6711.15,3825 6688.43,3802.27 6688.43,3734.49 Q3.2@6670,3716.06
  Bottom Layer w10: U6.2 6299.65,3892.8 6282.24,3875.39 6282.24,3852.24 6283.47,3851.02 6282.24,3849.8 6282.24,3833.43 6295.67,3820 6540,3820 R12.2
  other v1: 6440,3750 6510,3750 6580,3750 6650,3750
SER_RX: JP1.3 U2.7 | length 1335.1
  Top Layer w10: JP1.3 5270,2300 5270,2182.55 5304.83,2147.72 5353.75,2147.72 5355.56,2145.91 5356.59,2145.91 5424.69,2077.8 5424.69,2077.09 5440.59,2061.18 5440.59,1983.68 5463.68,1960.59 5529.41,1960.59 v1(5540,1950) ; v1(5920,2120) 5980,2180 U2.7
  Bottom Layer w10: v1(5540,1950) 5549.22,1950 5586.94,1912.28 5794.78,1912.28 5843.49,1961 5843.49,2043.49 v1(5920,2120)
SER_TX: JP1.2 U2.8 | length 1059.8
  Top Layer w10: JP1.2 5362.41,2228.85 5362.41,2161.87 5362.46,2161.81 5363.18,2161.81 5440.59,2084.39 5440.59,2083.68 5463.68,2060.59 5489.41,2060.59 v1(5600,1950) ; v1(5827.59,2245.91) 5827.59,2247.59 U2.8
  Bottom Layer w10: v1(5600,1950) 5621.81,1928.19 5788.19,1928.19 5827.59,1967.59 v1(5827.59,2245.91)
VCC: C1.2 C2.2 C3.2 C4.2 C5.2 C9.2 C10.2 C13.1 C14.1 C31.2 C32.2 C33.2 C34.2 C35.2 R1.2 U1.12 U1.14 U1.15 U1.17 U1.20 U2.3.3V U2.3.3V1 U4.2 U5.6 U6.6 | length 7887.2
  Top Layer w10: v1(5245,3885) 5237.01,3885 5204.09,3852.09 5204.09,2715.91 v1(5400,2520) ; U2.3.3V1 5500,2120 v1(5650,2120) ; v3@5780,2590 5820,2550 v3(5820,2400) ; v3(5783.39,2584.96) v3@5783.39,2586.61 ; v3(5849.41,2744.49) 5909.96,2805.04 C13.1@5909.96,2825 ; v1(6060,2220) 6410,1870 v1(6420,1870) 6490,1870 6580,1780 U2.3.3V ; U1.12 v3(6080,2480) 6080,2471.5 C31.2 C32.2 ; U1.14 6160.71,2465.79 C32.2 ; U1.15 6180,2530.98 6180,2480 6175,2475 C32.2 ; U1.17 6219.76,2481.73 C33.2 ; U1.20 6278.82,2480.31 C33.2 ; C35.2 C34.2 C33.2 ; C32.2 C33.2
  Bottom Layer w10: v1(5245,3885) 5245,3901.29 5222.01,3924.29 5222.01,3949.89 5252.01,3979.89 5252.01,4013.36 5277.03,4038.39 5871.61,4038.39 6000,3910 ; R1.2 5309.41,2050.91 5381.86,2050.91 5382.76,2050 5430,2050 U2.3.3V1 ; v1(5400,2520) 5579.92,2520 U4.2@5720,2660.08 ; v1(5650,2120) 5626.38,2120 5650,2096.38 5650,2009.22 5715.13,1944.09 5744.87,1944.09 5765.91,1965.13 5765.91,2157.78 5720,2203.68 U4.2@5720,2419.92 ; v3(5783.39,2584.96) 5783.39,2586.61 5720,2650 U4.2@5720,2660.08 ; v3(5820,2400) 5800.08,2419.92 U4.2@5720,2419.92 ; U5.6 5879.65,3892.8 C10.2 5972.44,3842.44 6000,3870 6000,3910 ; v3(5849.41,2744.49) 5849.41,2734.85 5834.75,2720.2 ; C14.1 5868.5,2686.45 5834.75,2720.2 ; C14.1@5880.63,2670 C14.1@5880.63,2674.32 ; v1(6060,2220) 5904.27,2220 5840.59,2283.68 5840.59,2299.33 U4.2@5720,2419.92 ; v3(6080,2480) 5780.08,2480 U4.2@5720,2419.92 ; U6.6 6149.53,3861.38 6088.94,3861.38 C9.2 6067.56,3842.44 6000,3910 ; v1(6420,1870) 6430,1880 C5.2 C4.2 C3.2 C2.2 C1.2 ; U4.2@5720,2660.08 5780.12,2720.2 5834.75,2720.2
VDD: C15.2 C16.2 C18.2 C19.2 C21.2 C25.2 C26.2 C27.2 C28.2 C29.2 C30.2 Q1.8 Q2.8 Q3.8 R5.2 U1.41 U1.46 U3.3 U3.14 | length 5471.2
  Top Layer w10: v1(5235,2420) 5236.38,2420 5235,2418.62 5235,2172.56 5291.66,2115.91 5340.57,2115.91 5408.78,2047.69 5408.78,1915.49 5463.68,1860.59 5475.13,1860.59 5540,1795.73 v1(5540,1760) ; v1(5380,2960) 5394.57,2945.43 C16.2 ; Q1.8 5525.51,3314.49 5754.09,3085.91 5804.87,3085.91 5830,3060.78 5830,2986.23 5793.3,2949.53 U3.14 ; U3.3 5564.09,2949.53 C16.2 ; v1(5710,3040) 5610,3040 5560,2990 C16.2 ; v3(6170,2930) 6180.79,2930 6180.39,2929.61 U1.46 ; U1.41 6278.82,2974.5 6285,2980.68 6285,3052.8
  Top Layer w20: Q2.8 6281.69,3052.8 ; 6285,3052.8 6422.2,3052.8 6455,3020 v1(6455,2905) ; Q3.8@6560,3174.49 6545,3189.49 6620,3264.49 Q3.8
  Bottom Layer w10: v1(5235,2420) 5235,2765 v1(5310,2840) ; v1(5540,1760) 5718.5,1760 R5.2 ; v1(5710,3040) 5710,3030 5770,2970 C15.2 ; v3(6170,2930) 6170,2904.02 C18.2
  Bottom Layer w20: C30.2 C25.2 C26.2 6490,2562.99 C21.2 ; C18.2 C19.2 C21.2 ; v1(6455,2905) 6490,2870 C21.2
  other v1: 5380,2840 5310,2900 5380,2900 5310,2960
pads on no net: U1.1 U1.16 U1.18 U1.19 U1.24 U1.25 U1.35 U1.36 U1.37 U1.42 U2.13 U2.A10 U2.A11 U2.AGND U2.AREF U2.PGM U2.RESET U2.VBAT U2.VIN U2.VUSB U3.2 U3.4 U3.5 U3.13 U3.15 U5.8 U6.8

## Polygon pours and split planes (outlines as drawn)
GND on Top Layer "GND_L01_P000" (solid, remove dead copper, pour order 0): 5170,3970 5280,4080 6700,4080 6870,3910 6870,1680 6870,1650 6835,1615 5205,1615 5170,1650
GND on Bottom Layer "GND_L02_P002" (solid, remove dead copper, pour order 2): 5170,3970 5280,4080 6700,4080 6870,3910 6870,1680 6870,1650 6835,1615 5205,1615 5170,1650

## Keep-outs
Keep-Out Layer:
  lines w7.87: 5140,1430 5190,1380 5350,1380 5420,1450 5420,1525 5460,1565 6580,1565 6620,1525 6620,1450 6690,1380 6850,1380 6900,1430 6900,1640 6900,3930 6720,4110 5245,4110 5140,4005 5140,3970 5140,1430

## Other copper
Top Layer:
  rectangle net SA: 5289.49,3630 5590,3800
  rectangle net SC: 6389.49,3630 6690,3800
  region net VDD: 5270,2800 5389.27,2800 ccw(c5389.27,2831.72) 5420.91,2829.49 cw(c5838.37,2800) 5612.99,3152.63 cw(c5784.2,2949.12) 5636.07,3170 6780,3170 6780,3460 5295,3460 ccw(c5295,3405) 5240,3405 5240,2830 ccw(c5269.99,2829.99)
  region net NetR11_1: 5290,3840 5590,3840 5590,4010 ccw(c5530,4010) 5530,4070 5350,4070 ccw(c5350,4010) 5290,4010
  region net NetR12_1: 6390,3840 6690,3840 6690,4010 ccw(c6630,4010) 6630,4070 6450,4070 ccw(c6450,4010) 6390,4010
  region net SB: 5840,3630 6140,3630 6140,4010 ccw(c6080,4010) 6080,4070 5900,4070 ccw(c5900,4010) 5840,4010
Bottom Layer:
  rectangle net SB: 5810,3330 6230,3800
  rectangle net SA: 5260,3335 5675,3800
  rectangle net SC: 6360,3330 6780,3800
  region net VDD: 5250,2700 5410,2700 ccw(c5410,2748.06) 5458.03,2746.36 cw(c6124.12,2722.77) 5500.81,2958.83 ccw(c5472.38,2969.59) 5472.38,3000 5230,3000 ccw(c5230,2970) 5200,2970 5200,2750 ccw(c5250,2750)
  region net GND: 5290,3020 5590,3020 5590,3190 cw(c5610,3190) 5610,3210 5820,3210 cw(c5820,3190) 5840,3190 5840,2820 ccw(c5890,2820) 5890,2770 6090,2770 ccw(c6090,2820) 6140,2820 6140,3190 cw(c6160,3190) 6160,3210 6400,3210 6400,3020 6690,3020 6690,3265 ccw(c6640,3265) 6640,3315 5340,3315 ccw(c5340,3265) 5290,3265

## Silkscreen, mask and mechanical layers (free items; w line width, h text height)
Bottom Overlay:
  text "ESC v2.0 - Raphael Chang" at 6375,1605 h30